# Altium PCB AD637均方根值检测.PcbDoc
Units mil, origin at the board's own origin, x right, y up, seen from the top; angles counter-clockwise.
Board outline 6000 x 4000 mil, 2 copper layers (Top Layer, Bottom Layer); 27 components, 17 nets, 90 pads, 2 vias.
Unrouted connection lines stored in the file: 2.
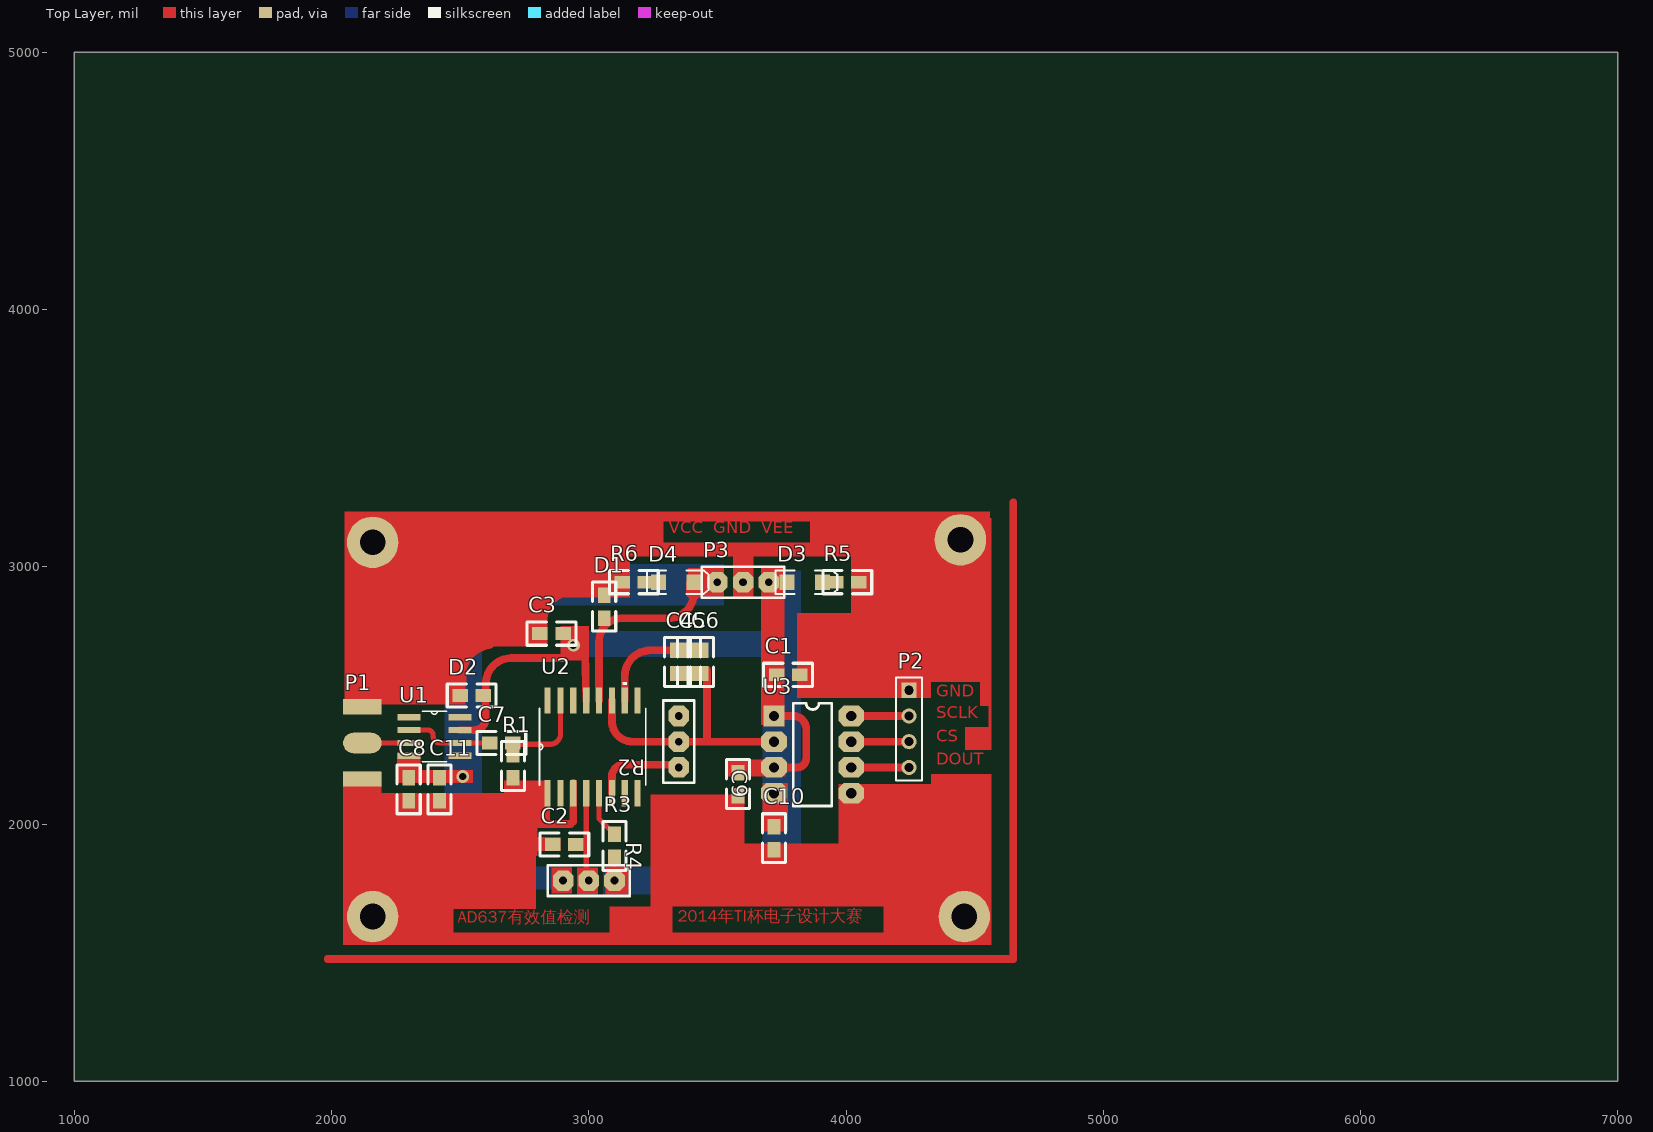
[diagram p0: Top Layer view]
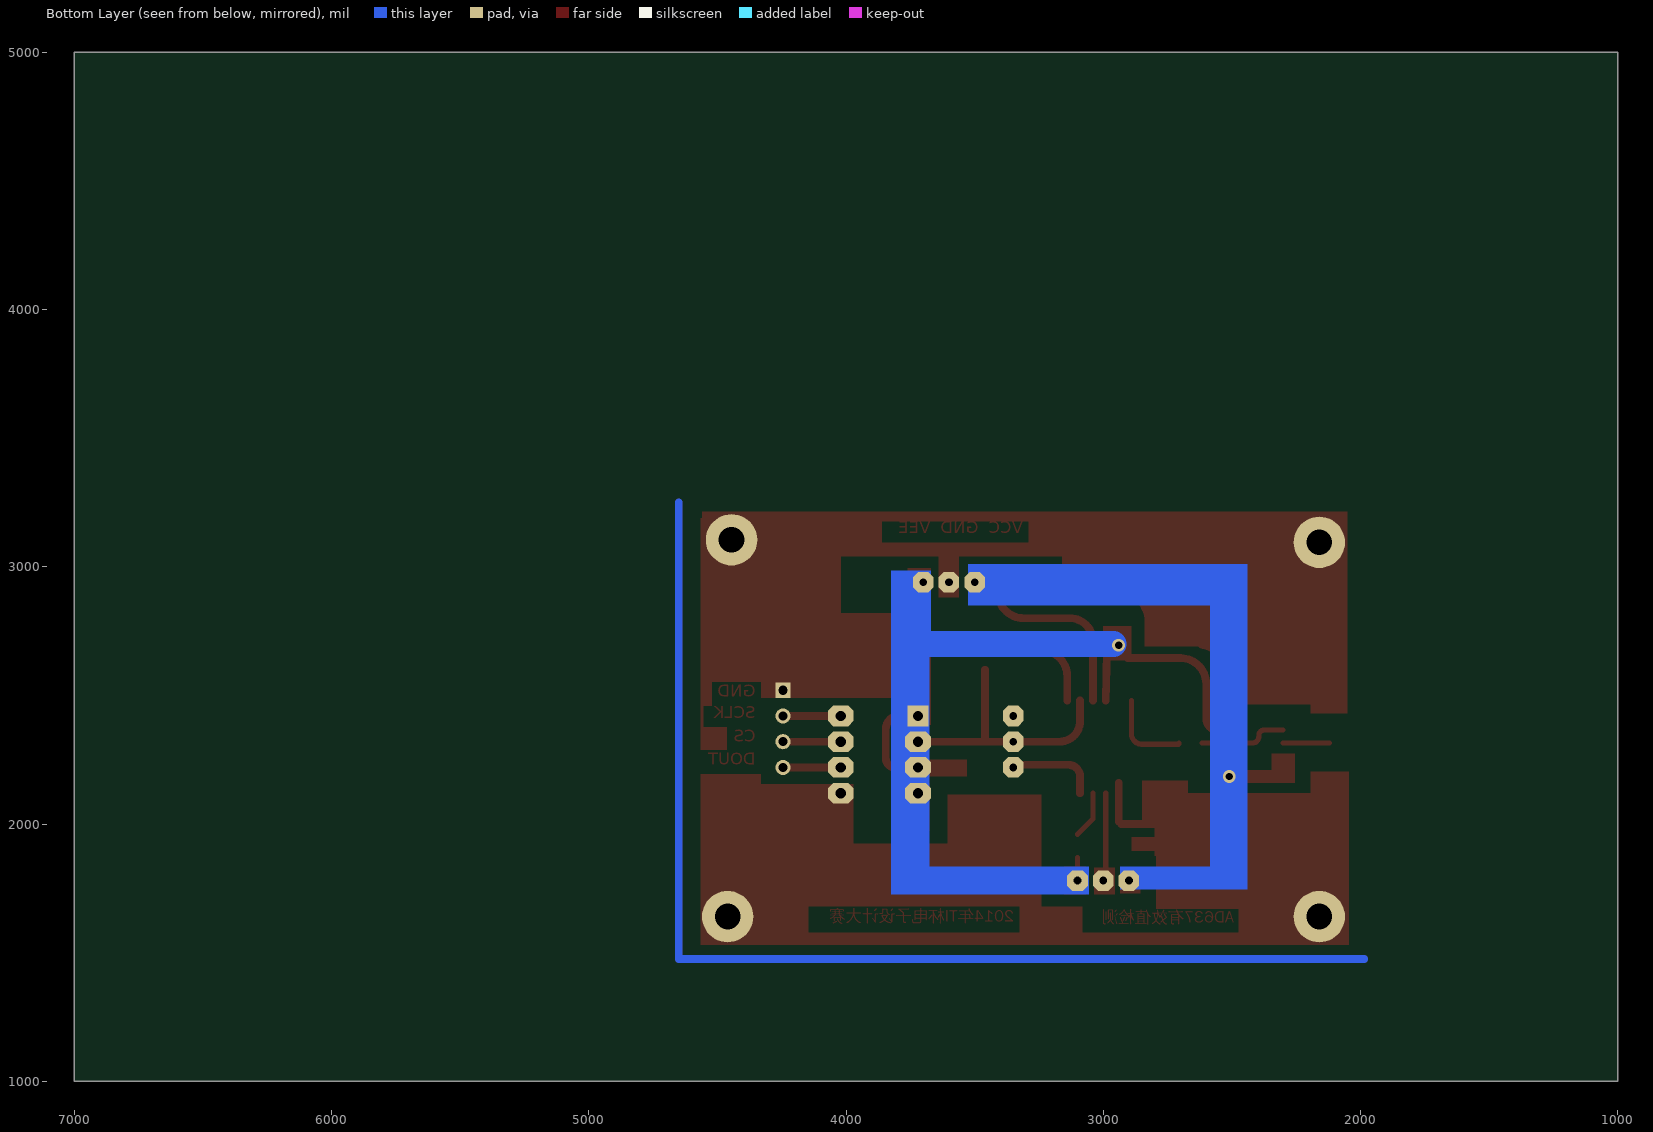
[diagram p1: Bottom Layer view, seen from below]

## Layer stack, top to bottom
Top Layer: signal copper 1.4
Dielectric: dielectric 12.6, FR-4, Dk 4.8
Bottom Layer: signal copper 1.4

## Board outline
1000,1000 7000,1000 7000,5000 1000,5000

## Design rules (kind name [scope] priority, off if disabled: settings)
Clearance [All] p1 off: gap=10
ComponentClearance [All] p1 off: gap=10 collisioncheckmode=3 verticalgap=10 showdistances=FALSE
Height [All] p1 off: minheight=0 maxheight=1000 prefheight=500
HoleSize [All] p1 off: absolutevalues=TRUE maxlimit=100 minlimit=1 maxpercent=80.000 minpercent=20.000
HoleToHoleClearance [All] p1 off: gap=10 allowstackedmicrovias=TRUE
LayerPairs [All] p1 off: enforce=TRUE
MinimumSolderMaskSliver [All] p1 off: minsoldermaskwidth=10
NetAntennae [All] p1 off: netantennaetolerance=0
PlaneClearance [All] p1 off: clearance=20
PlaneConnect [All] p1 off: planeconnectstyle=Relief reliefexpansion=20 reliefentries=4 reliefconductorwidth=10 reliefairgap=10
PolygonConnect [All] p1 off: connectstyle=Relief reliefconductorwidth=10 reliefentries=4 polygonreliefangle="90 Angle"
RoutingVias [All] p1: holewidth=28 width=50 viastyle="Through Hole" minholewidth=28 minwidth=50 maxholewidth=28 maxwidth=50
SilkToSilkClearance [All] p1 off: silktosilkclearance=10
SilkscreenOverComponentPads [All] p1 off: minsilkscreentomaskgap=10
SolderMaskExpansion [All] p1: expansion=4
TestPointUsage [All] p1 off: valid=0 allowmultiple=FALSE
Testpoint [All] p1 off: side=15 testpointundercomponent=TRUE minsize=40 maxsize=100 preferedsize=60 minholesize=0 maxholesize=40 preferedholesize=32 testpointgrid=1 style=1023 order=0123456789
Width [All] p1: maxlimit=100 minlimit=30 preferedwidth=30
13 further rules are at their usual default settings.

## Components (designator, comment, footprint, x,y, rotation, side; value= is the part's Value field where it differs from the comment)
C1 "Cap" 0805 3820,2580 r180 top
C2 "Cap" 0805 2860,1920 r0 top
C3 "Cap" 0805 2900,2740 r180 top
C4 "Cap" 0805 3340,2585 r90 top
C5 "Cap" 0805 3390,2585 r90 top
C6 "Cap" 0805 3440,2585 r90 top
C7 "Cap" 0805 2615,2315 r0 top
C8 "Cap" 0805 2300,2180 r270 top
C9 "Cap" 0805 3580,2200 r270 top
C10 "Cap" 0805 3720,1900 r90 top
C11 "Cap" 0805 2420,2180 r270 top (schematic designator C8)
D1 "Diode 1N4007" 0805 3060,2800 r90 top
D2 "Diode 1N4007" 0805 2500,2500 r0 top
D3 "LED2" 3.2X1.6X1.1 3840,2940 r0 top
D4 "LED2" 3.2X1.6X1.1 3340,2940 r0 top
P1 "SMA" SMA 2040,2485 r0 top
P2 "Header 4" HDR1X4 4245,2520 r270 top
P3 "Header 3" 3P排针 3500,2940 r0 top
R1 "Res2" 0805 2705,2180 r90 top
R2 "1K" 3P排针 3350,2420 r270 top
R3 "Res2" 0805 3100,1960 r270 top
R4 "50K" 3P排针 2900,1780 r0 top
R5 "Res2" 0805 3960,2940 r0 top
R6 "Res2" 0805 3220,2940 r180 top
U1 "OPA656" THS3001_SOIC 2400,2340 r0 top
U2 "AD637" AD637_SOIC 3020,2300 r90 top
U3 "MAX187" DIP8 3720,2420 r0 top

## Footprints (in the part's own frame and the unit in brackets; to place one, negate y for a bottom-side part, rotate by r counter-clockwise, add the part's x,y. Pads: shape width x height; smd on the part's side, far side on the other; paste and mask are expansions set on the pad)
3.2X1.6X1.1 [mm] "SMT LED; 2 Flat Leads"
  rect 1.5x1.5 smd: 1(-1.75,0) 2(1.75,0)
  silkscreen extent -2.9,-1.15 3.2,1.15
3P排针 [mil]
  oct 80x80 hole 30: 1(0,0) 2(100,0) 3(200,0)
  silkscreen extent -60,-60 260,60
0805 [mil]
  rect 60x50 smd: 1(0,0) 2(90,0)
  silkscreen extent -50,-45 140,45
AD637_SOIC [mil]
  rect 102.5x24 smd: 1(-180.25,180) 2(-180.25,130) 3(-180.25,80) 4(-180.25,30) 5(-180.25,-20) 6(-180.25,-70) 7(-180.25,-120) 8(-180.25,-170) 9(180.25,-170) 10(180.25,-120) 11(180.25,-70) 12(180.25,-20) 13(180.25,30) 14(180.25,80) 15(180.25,130) 16(180.25,180)
  silkscreen extent -150,-202 252,212
DIP8 [mil]
  rect 80x80 hole 40: 1(0,0)
  oct 100x80 hole 40: 2(0,-100) 3(0,-200) 4(0,-300) 5(300,-300) 6(300,-200) 7(300,-100) 8(300,0)
  silkscreen extent 75,-350 225,50
HDR1X4 [mm] "Connector; Header; 4 Position"
  rect 1.5x1.5 hole 0.9: 1(0,0)
  round 1.5 hole 0.9: 2(2.54,0) 3(5.08,0) 4(7.62,0)
  silkscreen extent -1.27,-1.27 8.89,1.27
SMA [mil]
  oval 150x80 smd: 1(80,-170)
  rect 150x60 smd: 2(80,-310) 2(80,-30)
THS3001_SOIC [mil]
  rect 90x24 smd: 1(-99,75) 2(-99,25) 3(-99,-25) 4(-99,-75) 5(99,-75) 6(99,-25) 7(99,25) 8(99,75)
  silkscreen extent -48,-98 48,98

## Part data
C1 C2 C3 C4 C5 C6 C7 C8 C9 C10 C11: "Capacitor"
D1 D2: "1 Amp General Purpose Rectifier"
D3 D4: "Typical RED, GREEN, YELLOW, AMBER GaAs LED"
P2: "Header, 4-Pin"
P3: "Header, 3-Pin"
R1 R3 R5 R6: "Resistor"
R2 R4: library part 电位器_3296W
U3: "+5V、低功耗、12位串行ADC"

## Free pads (board coordinates)
  round 200 hole 100: 0(2160,1640) 0(4445,3105) 0(4460,1640) 1(2160,3095)

## Via types
v1: diameter 50, hole 28, Top Layer to Bottom Layer, 2 vias

## Nets (pads, with @x,y where several pads share a name; then routed paths per layer and width w, separated by ;. In a path a pad name is that pad's centre, name@x,y a point inside that pad or via, vN(x,y) a via of type N, cw(c..) or ccw(c..) an arc to the next point about the centre after c; other vN are vias at no path point)
+5V: C1.2 C3.1 C9.1 D2.2 D3.1 P3.3 R3.2 R4.3 U1.7 U2.13 U3.1 U3.3 | length 2092.1
  Top Layer w20: R4.3 R3.2
  Top Layer w30: U1.7 2555,2365 ccw(c2555,2410) 2600,2410 2600,2545 cw(c2700,2545) 2700,2645 2905,2645 ; 2985,2675 U2.13 ; U3.3 3810,2220 ccw(c3810,2255) 3845,2255 3845,2370 ccw(c3795,2370) 3795,2420 U3.1
  Bottom Layer w100: v1@2960,2700 3730,2700
  other v1: 2940,2695
-5V: C8.1 D1.1 D4.2 P3.1 R4.1 U1.4 U2.12 | length 913.5
  Top Layer w30: U2.12 3040,2710 ; 3408.9,2900 cw(c3308.9,2900) 3308.9,2800 3130,2800 ; D4.2@3408.9,2915 D4.2 ; 3040,2710 cw(c3130,2710) 3130,2800 ; 3040,2710 cw(c3130,2710) 3130,2800
  Top Layer w60: 3408.9,2900 D4.2
  other v1: 2510,2185
AGND: C1.1 C2.1 C3.2 C8.2 C9.2 C10.1 D1.2 D2.1 P1.2 P2.1 P3.2 pad.0 pad.1 R1.1 R5.2 R6.2 U2.1 U2.3 U3.5 | length 727.9
  Top Layer w20: 2930,2000 2940,2010
  Top Layer w30: 2795,2000 2930,2000 ; 2940,2010 U2.3@2940,2160
  Top Layer w60: 2495,2555 cw(c2630,2575) 2610,2710 ; 2810,2765 cw(c2945,2785) 2925,2920
NetC4_1: C4.1 C5.1 C6.1 R2.2 U2.11 U3.2 | length 1164.4
  Top Layer w20: 3090,2400 ccw(c3170,2400) 3170,2320 ; 3445,2325 ccw(c3450,2325) 3450,2320
  Top Layer w30: U2.11 3090,2400 ccw(c3170,2400) 3170,2320 R2.2 U3.2 ; 3460,2325 C6.1@3460,2600
NetC4_2: C4.2 C5.2 C6.2 U2.10 | length 351.8
  Top Layer w30: U2.10 3140,2575 cw(c3240,2575) 3240,2675 C4.2
NetC7_1: C7.1 U1.2 U1.6 | length 344.7
  Top Layer w20: U1.2 2375,2365 cw(c2375,2345) 2395,2345 2395,2340 ccw(c2420,2340) 2420,2315 U1.6 C7.1
NetC7_2: C7.2 R1.2 U2.15 | length 348.8
  Top Layer w20: U2.15 2890,2350 cw(c2850,2350) 2850,2310 C7.2@2710,2310 ; C7.2@2710,2310 cw(c2710,2315) C7.2 ccw(c2710,2315) C7.2@2710,2310
NetC10_2: C10.2 U3.4
NetD3_2: D3.2 R5.1
NetD4_1: D4.1 R6.1
NetP1_1: P1.1 U1.3 | length 181
  Top Layer w20: P1.1 U1.3
NetP2_2: P2.2 U3.8 | length 225
  Top Layer w30: U3.8 P2.2
NetP2_3: P2.3 U3.7 | length 225
  Top Layer w30: U3.7 P2.3
NetP2_4: P2.4 U3.6 | length 225
  Top Layer w30: U3.6 P2.4
NetR2_3: R2.3 U2.6 | length 380.4
  Top Layer w20: R2.3@3325.86,2230 cw(c3325.86,2195.86) R2.3 ccw(c3325.86,2195.86) R2.3@3325.86,2230
  Top Layer w30: U2.6 3090,2185 cw(c3135,2185) 3135,2230 R2.3@3325.86,2230
NetR3_1: R3.1 U2.5 | length 184.6
  Top Layer w20: U2.5 3040,2020 R3.1
NetR4_2: C2.2 R4.2 U2.4 | length 329.8
  Top Layer w20: R4.2@2990,1790 2990,1900 U2.4
pads on no net: C11.1 C11.2 R2.1 U1.1 U1.5 U1.8 U2.2 U2.7 U2.8 U2.9 U2.14 U2.16
copper on no net: | length 8880
  Top Layer w30: 1985,1475 4650,1475 4650,3250
  Bottom Layer w30: 1985,1475 4650,1475 4650,3250

## Other copper
Top Layer:
  rectangle net AGND: 4330,2552.17 4521.44,2582.17
  rectangle net AGND: 4521.44,2459.14 4565,2489.14
  rectangle net AGND: 4521.44,2489.14 4565,2582.17
  rectangle net AGND: 4330,2582.17 4565,2820
  rectangle net AGND: 3081.54,1572.74 3325.08,1680
  rectangle net -5V: 2345,2160 2550,2210
  rectangle net AGND: 2045,2120 2195,2205
  rectangle net AGND: 2780,1895 2890,1950
  rectangle net AGND: 2670,2010 2850,2170
  rectangle net NetR4_2: 2955,1725 3035,1830
  rectangle net +5V: 3065,1725 3155,1835
  rectangle net NetC10_2: 3675,1970 3775,2160
  rectangle: 4553.69,2377.17 4565.8,2467.17
  rectangle net AGND: 2680,1875 2800,2020
  rectangle net -5V: 3385,2885 3525,2995
  rectangle net AGND: 3560,2880 3640,3060
  rectangle net AGND: 2050,2430 2195,2915
  rectangle net +5V: 3670,2385 3760,2995
  rectangle net AGND: 3105,3040 4020,3094.14
  rectangle net -5V: 2255,2160 2345,2275
  rectangle net AGND: 3240,1680 3970,1925
  rectangle net -5V: 2855,1730 2935,1830
  rectangle net +5V: 3530,2185 3765,2250
  rectangle net +5V: 2890,2635 3000,2770
  rectangle net AGND: 3859.21,3094.14 4020,3190
  rectangle net AGND: 3105,3040 3289.92,3187.17
  rectangle net AGND: 3130,3175 3880,3205
  rectangle: 4462.16,2287.17 4565.8,2377.17
  rectangle net AGND: 2045,1530 2475,1875
  rectangle net AGND: 2045,1875 2680,2120
  rectangle net AGND: 3240,1855 3605,2115
  rectangle: 4330,1680 4565.8,2194.14
  rectangle net AGND: 2190,2465 2520,2885
  rectangle net AGND: 2475,1530 4565.8,1577.5
  rectangle net AGND: 2195,2880 3160,2915
  rectangle net AGND: 2475,1670 2795,1875
  rectangle net AGND: 2520,2690 2840,2885
  rectangle net AGND: 2050,3190 4560,3215
  rectangle net AGND: 3970,1680 4330,2155
  rectangle net AGND: 4145,1577.5 4565.8,1680
  rectangle net AGND: 4020,2820 4565,3190
  rectangle net AGND: 2050,2915 3160,3190
  rectangle net AGND: 3810,2490 4330,2820
  text "VCC  GND  VEE" at 3310,3115 h80
  text "GND" at 4350,2480 h80
  text "SCLK" at 4350,2395 h80
  text "CS" at 4350,2305 h80
  text "DOUT" at 4350,2215 h80
  text "2014年TI杯电子设计大赛" at 3345,1605 h80
  text "AD637有效值检测" at 2490,1600 h80
Bottom Layer:
  rectangle net -5V: 2585,1745 2935,1835
  rectangle net +5V: 3055,1725 3675,1835
  rectangle: 3675,1725 3825,2655
  rectangle net -5V: 2440,1745 2585,2850
  rectangle net -5V: 2440,2850 3525,3010
  rectangle net +5V: 3670,2655 3825,2985